# Altium PCB PCB.PcbDoc
Units mm, origin at the board's own origin, x right, y up, seen from the top; angles counter-clockwise.
Board outline 140 x 140 mm, 2 copper layers (Top Layer, Bottom Layer); 231 components, 171 nets, 631 pads, 0 vias.
Unrouted connection lines stored in the file: 429.
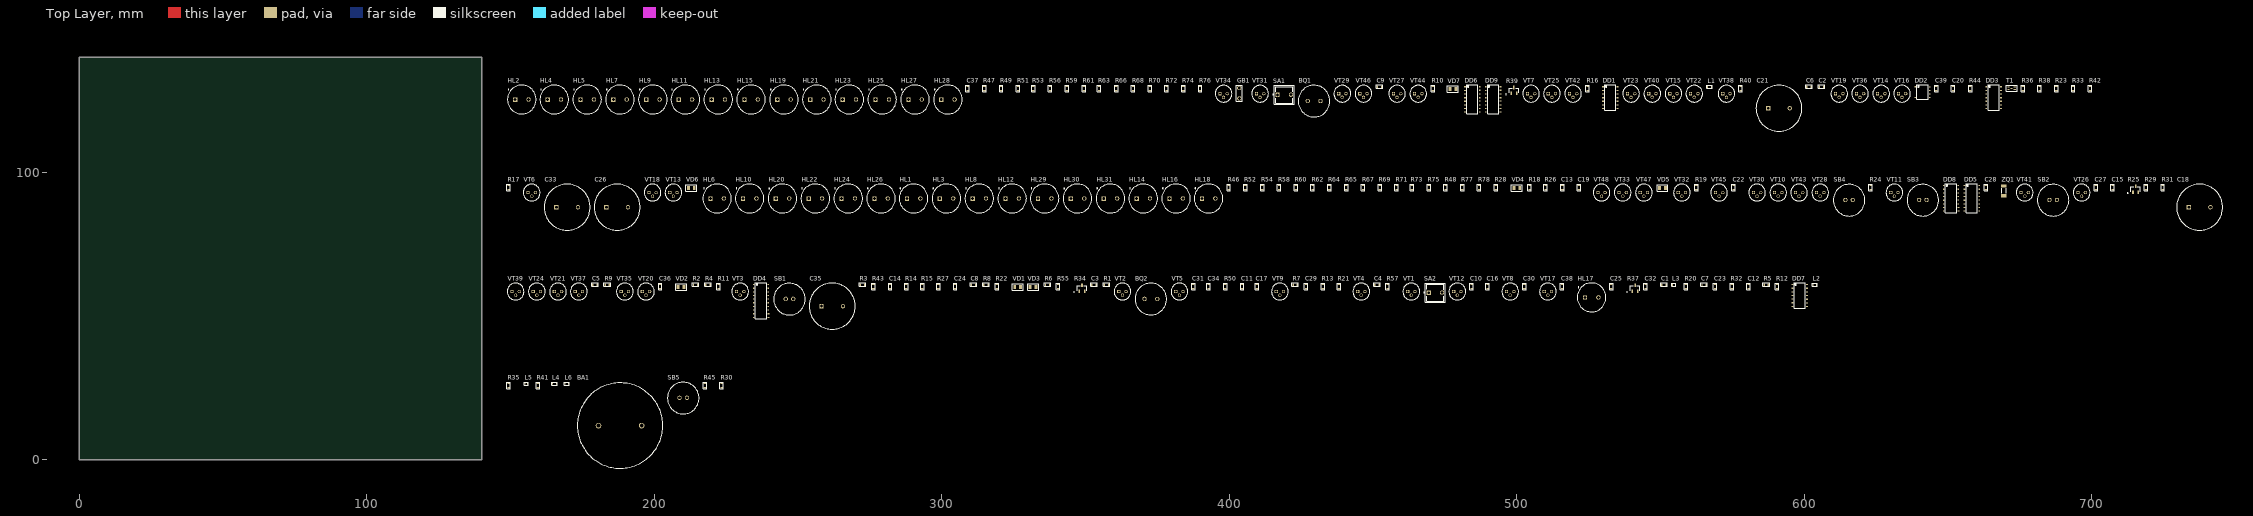
[diagram p0: Top Layer view]
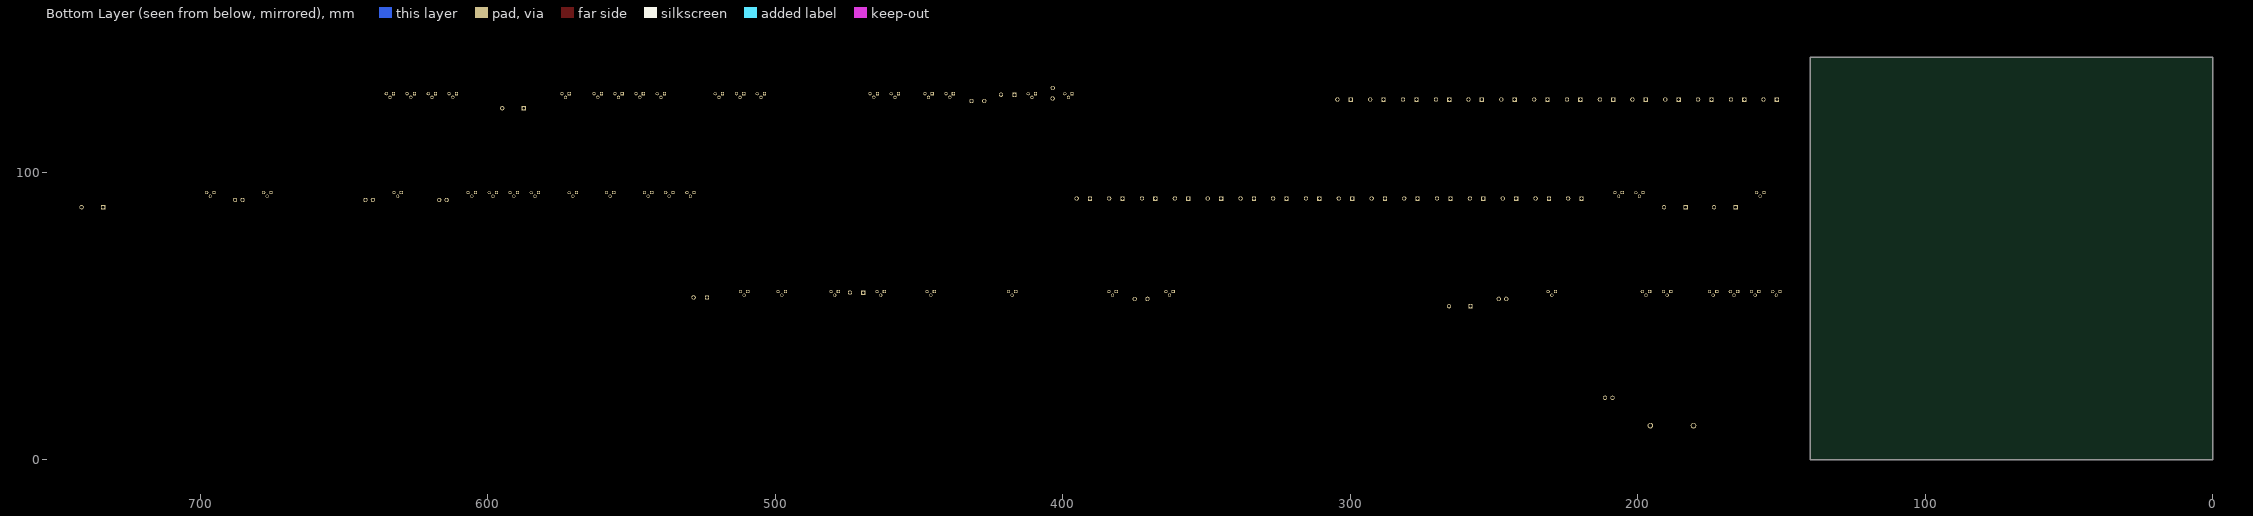
[diagram p1: Bottom Layer view, seen from below]

## Layer stack, top to bottom
Top Solder: solder mask 0.0102, Solder Resist, Dk 3.5
Top Layer: signal copper 0.0356
Dielectric 1: dielectric 0.32, FR-4, Dk 4.8
Bottom Layer: signal copper 0.0356
Bottom Solder: solder mask 0.0102, Solder Resist, Dk 3.5

## Board outline
0,0 140,0 140,140 0,140

## Design rules (kind name [scope] priority, off if disabled: settings)
Clearance [All] p1: gap=0.254 ignorepadtopadclearanceinfootprint=FALSE except(0: Arc-Hole Track-Hole SMDPad-Hole THPad-Hole Via-Hole Fill-Hole Poly-Hole Region-Hole Text-Hole)
PolygonConnect [All] p1: connectstyle=Relief reliefconductorwidth=0.254 reliefentries=4 polygonreliefangle="90 Angle" airgapwidth=0.254
RoomDefinition A1H1_last2.0 [InComponentClass('A1H1_last2.0')] p1: confinementstyle=ConfineIn formatcopy=TRUE lockcomponents=FALSE outline 148.543,-3.403 745.697,-3.403 745.697,133.122 148.543,133.122
RoutingVias [All] p1: holewidth=0.711 width=1.27 viastyle="Through Hole" minholewidth=0.711 minwidth=1.27 maxholewidth=0.711 maxwidth=1.27
SolderMaskExpansion [All] p1: expansion=0.102 istentingtop=FALSE
Width [All] p1: maxlimit=0.254 minlimit=0.254 preferedwidth=0.254
30 further rules are at their usual default settings.

## Components (designator, comment, footprint, x,y, rotation, side; value= is the part's Value field where it differs from the comment)
BA1 "DINAMYC" DINAMIK 188.04,11.964 r0 top
BQ1 "datchik" ZP-1 429.34,124.867 r0 top
BQ2 "datchik" ZP-1 372.571,56.033 r0 top
C1 "Cap" "SMD 0603" 551.133,60.986 r0 top
C2 "Cap" "SMD 0603" 605.87,129.82 r0 top
C3 "Cap" "SMD 0603" 352.886,60.986 r0 top
C4 "Cap" "SMD 0603" 451.311,60.986 r0 top
C5 "Cap" "SMD 0603" 179.277,60.986 r0 top
C6 "Cap" "SMD 0603" 601.552,129.82 r0 top
C7 "Cap" "SMD 0603" 565.103,60.986 r0 top
C8 "Cap" "SMD 0603" 310.976,60.986 r0 top
C9 "Cap" "SMD 0603" 452.2,129.82 r0 top
C10 "Cap" "SMD 0603" 484.204,60.351 r90 top
C11 "Cap" "SMD 0603" 404.448,60.351 r90 top
C12 "Cap" "SMD 0603" 580.597,60.351 r90 top
C13 "Cap" "SMD 0603" 515.827,94.768 r90 top
C14 "Cap" "SMD 0603" 282.02,60.351 r90 top
C15 "Cap" "SMD 0603" 707.216,94.768 r90 top
C16 "Cap" "SMD 0603" 489.792,60.351 r90 top
C17 "Cap" "SMD 0603" 409.528,60.351 r90 top
C18 "CapPlus" cap 737.442,87.91 r0 top
C19 "Cap" "SMD 0603" 521.542,94.768 r90 top
C20 "Cap" "SMD 0603" 651.717,129.185 r90 top
C21 "CapPlus" cap 591.138,122.327 r0 top
C22 "Cap" "SMD 0603" 575.39,94.768 r90 top
C23 "Cap" "SMD 0603" 568.913,60.351 r90 top
C24 "Cap" "SMD 0603" 304.626,60.351 r90 top
C25 "Cap" "SMD 0603" 532.845,60.351 r90 top
C26 "CapPlus" cap 187.024,87.91 r0 top
C27 "Cap" "SMD 0603" 701.374,94.768 r90 top
C28 "Cap" "SMD 0603" 663.147,94.768 r90 top
C29 "Cap" "SMD 0603" 426.673,60.351 r90 top
C30 "Cap" "SMD 0603" 502.619,60.351 r90 top
C31 "Cap" "SMD 0603" 387.43,60.351 r90 top
C32 "Cap" "SMD 0603" 544.783,60.351 r90 top
C33 "CapPlus" cap 169.625,87.91 r0 top
C34 "Cap" "SMD 0603" 392.764,60.351 r90 top
C35 "CapPlus" cap 261.827,53.493 r0 top
C36 "Cap" "SMD 0603" 202.01,60.351 r90 top
C37 "Cap" "SMD 0603" 308.944,129.185 r90 top
C38 "Cap" "SMD 0603" 515.7,60.351 r90 top
C39 "Cap" "SMD 0603" 645.875,129.185 r90 top
DD1 "dd" DIP14 529.924,129.82 r0 top
DD2 "K561TM2" DD2 638.509,129.82 r0 top
DD3 "К561ЛН2" DIP14 663.274,129.82 r0 top
DD4 "AT89C2051" DD4 234.522,60.986 r0 top
DD5 "К561ИР2" DIP16 655.654,95.403 r0 top
DD6 "К561ИР2" DIP16 481.918,129.82 r0 top
DD7 "dd" DIP14 595.837,60.986 r0 top
DD8 "К561ИР2" DIP16 648.415,95.403 r0 top
DD9 "К561ИР2" DIP16 489.157,129.82 r0 top
GB1 "batareyka" BATAREIKA 404.448,110.008 r90 top
HL1 "sveto_diod" HL 290.148,90.958 r0 top
HL2 "sveto_diod" HL 153.877,125.375 r0 top
HL3 "sveto_diod" HL 301.578,90.958 r0 top
HL4 "sveto_diod" HL 165.18,125.375 r0 top
HL5 "sveto_diod" HL 176.61,125.375 r0 top
HL6 "sveto_diod" HL 221.822,90.958 r0 top
HL7 "sveto_diod" HL 188.04,125.375 r0 top
HL8 "sveto_diod" HL 313.008,90.958 r0 top
HL9 "sveto_diod" HL 199.47,125.375 r0 top
HL10 "sveto_diod" HL 233.125,90.958 r0 top
HL11 "sveto_diod" HL 210.773,125.375 r0 top
HL12 "sveto_diod" HL 324.438,90.958 r0 top
HL13 "sveto_diod" HL 222.203,125.375 r0 top
HL14 "sveto_diod" HL 370.031,90.958 r0 top
HL15 "sveto_diod" HL 233.633,125.375 r0 top
HL16 "sveto_diod" HL 381.461,90.958 r0 top
HL17 "sveto_diod" HL 525.987,56.541 r0 top
HL18 "sveto_diod" HL 392.764,90.958 r0 top
HL19 "sveto_diod" HL 245.063,125.375 r0 top
HL20 "sveto_diod" HL 244.555,90.958 r0 top
HL21 "sveto_diod" HL 256.493,125.375 r0 top
HL22 "sveto_diod" HL 255.985,90.958 r0 top
HL23 "sveto_diod" HL 267.796,125.375 r0 top
HL24 "sveto_diod" HL 267.415,90.958 r0 top
HL25 "sveto_diod" HL 279.226,125.375 r0 top
HL26 "sveto_diod" HL 278.845,90.958 r0 top
HL27 "sveto_diod" HL 290.656,125.375 r0 top
HL28 "sveto_diod" HL 302.086,125.375 r0 top
HL29 "sveto_diod" HL 335.741,90.958 r0 top
HL30 "sveto_diod" HL 347.171,90.958 r0 top
HL31 "sveto_diod" HL 358.601,90.958 r0 top
L1 "induktor_4" inductor 567.008,129.82 r0 top
L2 "induktor_4" inductor 603.584,60.986 r0 top
L3 "induktor_2" INDUCTOR_LOW 554.562,60.986 r0 top
L4 "induktor_4" inductor 165.18,26.569 r0 top
L5 "induktor_2" INDUCTOR_LOW 155.401,26.569 r0 top
L6 "induktor_4" inductor 169.498,26.569 r0 top
R1 "res" "SMD 0603" 357.204,60.986 r0 top
R2 "res" "SMD 0603" 214.329,60.986 r0 top
R3 "res" "SMD 0603" 272.368,60.986 r0 top
R4 "res" "SMD 0603" 218.647,60.986 r0 top
R5 "res" "SMD 0603" 586.693,60.986 r0 top
R6 "res" "SMD 0603" 336.757,60.986 r0 top
R7 "res" "SMD 0603" 422.863,60.986 r0 top
R8 "res" "SMD 0603" 315.294,60.986 r0 top
R9 "res" "SMD 0603" 183.595,60.986 r0 top
R10 "res" "SMD 0603" 470.742,129.185 r90 top
R11 "res" "SMD 0603" 222.33,60.351 r90 top
R12 "res" "SMD 0603" 590.503,60.351 r90 top
R13 "res" "SMD 0603" 432.515,60.351 r90 top
R14 "res" "SMD 0603" 287.608,60.351 r90 top
R15 "res" "SMD 0603" 293.196,60.351 r90 top
R16 "res" "SMD 0603" 524.59,129.185 r90 top
R17 "res" "SMD 0603" 149.305,94.768 r90 top
R18 "res" "SMD 0603" 504.397,94.768 r90 top
R19 "res" "SMD 0603" 562.436,94.768 r90 top
R20 "res" "SMD 0603" 558.753,60.351 r90 top
R21 "res" "SMD 0603" 438.103,60.351 r90 top
R22 "res" "SMD 0603" 319.104,60.351 r90 top
R23 "res" "SMD 0603" 687.658,129.185 r90 top
R24 "res" "SMD 0603" 623.015,94.768 r90 top
R25 "res_per" 21-0051H 715.217,94.133 r0 top
R26 "res" "SMD 0603" 509.985,94.768 r90 top
R27 "res" "SMD 0603" 298.784,60.351 r90 top
R28 "res" "SMD 0603" 492.713,94.768 r90 top
R29 "res" "SMD 0603" 718.773,94.768 r90 top
R30 "res" "SMD 0603" 223.346,25.934 r90 top
R31 "res" "SMD 0603" 724.615,94.768 r90 top
R32 "res" "SMD 0603" 574.755,60.351 r90 top
R33 "res" "SMD 0603" 693.5,129.185 r90 top
R34 "res_per" 21-0051H 348.695,59.716 r0 top
R35 "res" "SMD 0603" 149.305,25.934 r90 top
R36 "res" "SMD 0603" 675.974,129.185 r90 top
R37 "res_per" 21-0051H 541.1,59.716 r0 top
R38 "res" "SMD 0603" 681.816,129.185 r90 top
R39 "res_per" 21-0051H 498.936,128.55 r0 top
R40 "res" "SMD 0603" 577.803,129.185 r90 top
R41 "res" "SMD 0603" 159.465,25.934 r90 top
R42 "res" "SMD 0603" 699.342,129.185 r90 top
R43 "res" "SMD 0603" 276.178,60.351 r90 top
R44 "res" "SMD 0603" 657.686,129.185 r90 top
R45 "res" "SMD 0603" 217.504,25.934 r90 top
R46 "res" "SMD 0603" 399.749,94.768 r90 top
R47 "res" "SMD 0603" 314.786,129.185 r90 top
R48 "res" "SMD 0603" 475.187,94.768 r90 top
R49 "res" "SMD 0603" 320.628,129.185 r90 top
R50 "res" "SMD 0603" 398.606,60.351 r90 top
R51 "res" "SMD 0603" 326.47,129.185 r90 top
R52 "res" "SMD 0603" 405.591,94.768 r90 top
R53 "res" "SMD 0603" 331.804,129.185 r90 top
R54 "res" "SMD 0603" 411.433,94.768 r90 top
R55 "res" "SMD 0603" 340.44,60.351 r90 top
R56 "res" "SMD 0603" 337.646,129.185 r90 top
R57 "res" "SMD 0603" 454.994,60.351 r90 top
R58 "res" "SMD 0603" 417.275,94.768 r90 top
R59 "res" "SMD 0603" 343.488,129.185 r90 top
R60 "res" "SMD 0603" 423.117,94.768 r90 top
R61 "res" "SMD 0603" 349.33,129.185 r90 top
R62 "res" "SMD 0603" 428.959,94.768 r90 top
R63 "res" "SMD 0603" 354.664,129.185 r90 top
R64 "res" "SMD 0603" 434.801,94.768 r90 top
R65 "res" "SMD 0603" 440.643,94.768 r90 top
R66 "res" "SMD 0603" 360.633,129.185 r90 top
R67 "res" "SMD 0603" 446.485,94.768 r90 top
R68 "res" "SMD 0603" 366.475,129.185 r90 top
R69 "res" "SMD 0603" 452.327,94.768 r90 top
R70 "res" "SMD 0603" 372.317,129.185 r90 top
R71 "res" "SMD 0603" 458.169,94.768 r90 top
R72 "res" "SMD 0603" 378.159,129.185 r90 top
R73 "res" "SMD 0603" 463.503,94.768 r90 top
R74 "res" "SMD 0603" 384.001,129.185 r90 top
R75 "res" "SMD 0603" 469.345,94.768 r90 top
R76 "res" "SMD 0603" 389.843,129.185 r90 top
R77 "res" "SMD 0603" 481.029,94.768 r90 top
R78 "res" "SMD 0603" 486.871,94.768 r90 top
SA1 "key2" switch 419.053,127.026 r0 top
SA2 "key2" switch 471.631,58.192 r0 top
SB1 "key3" BUTTON 246.968,56.033 r0 top
SB2 "key3" BUTTON 686.515,90.45 r0 top
SB3 "key3" BUTTON 641.176,90.45 r0 top
SB4 "key3" BUTTON 615.522,90.45 r0 top
SB5 "key3" BUTTON 210.011,21.616 r0 top
T1 "transformator" TRANSFORMATOR4 672.037,129.312 r0 top
VD1 "diod" res 326.343,60.224 r0 top
VD2 "diod" res 209.249,60.224 r0 top
VD3 "diod" res 331.677,60.224 r0 top
VD4 "diod" res 499.952,94.641 r0 top
VD5 "diod" res 550.625,94.641 r0 top
VD6 "diod" res 212.805,94.641 r0 top
VD7 "diod" res 477.727,129.058 r0 top
VT1 "TransistorNpN" Transistor 463.249,58.573 r0 top
VT2 "TransistorNpN" Transistor 362.792,58.573 r0 top
VT3 "TransistorNpN" Transistor 229.823,58.573 r0 top
VT4 "TransistorNpN" Transistor 445.85,58.573 r0 top
VT5 "TransistorNpN" Transistor 382.604,58.573 r0 top
VT6 "TransistorNpN" Transistor 157.306,92.99 r0 top
VT7 "TransistorNN" Transistor 504.905,127.407 r0 top
VT8 "TransistorNpN" Transistor 497.666,58.573 r0 top
VT9 "TransistorNpN" Transistor 417.529,58.573 r0 top
VT10 "TransistorNpN" Transistor 590.884,92.99 r0 top
VT11 "TransistorNpN" Transistor 631.27,92.99 r0 top
VT12 "TransistorNN" Transistor 479.251,58.573 r0 top
VT13 "TransistorPnP" Transistor 206.582,92.99 r0 top
VT14 "TransistorUNO" Transistor 626.698,127.407 r0 top
VT15 "TransistorNN" Transistor 554.435,127.407 r0 top
VT16 "TransistorUNO" Transistor 633.937,127.407 r0 top
VT17 "TransistorNpN" Transistor 510.747,58.573 r0 top
VT18 "TransistorPnP" Transistor 199.343,92.99 r0 top
VT19 "TransistorNpN" Transistor 612.093,127.407 r0 top
VT20 "TransistorNpN" Transistor 197.057,58.573 r0 top
VT21 "TransistorNpN" Transistor 166.45,58.573 r0 top
VT22 "TransistorNpN" Transistor 561.674,127.407 r0 top
VT23 "TransistorNpN" Transistor 539.703,127.407 r0 top
VT24 "TransistorNpN" Transistor 159.084,58.573 r0 top
VT25 "TransistorNpN" Transistor 512.144,127.407 r0 top
VT26 "TransistorNpN" Transistor 696.421,92.99 r0 top
VT27 "TransistorNpN" Transistor 458.296,127.407 r0 top
VT28 "TransistorNpN" Transistor 605.489,92.99 r0 top
VT29 "TransistorNpN" Transistor 439.246,127.407 r0 top
VT30 "TransistorNpN" Transistor 583.518,92.99 r0 top
VT31 "TransistorNpN" Transistor 410.671,127.407 r0 top
VT32 "TransistorNpN" Transistor 557.356,92.99 r0 top
VT33 "TransistorNpN" Transistor 536.782,92.99 r0 top
VT34 "TransistorNpN" Transistor 397.971,127.407 r0 top
VT35 "TransistorNpN" Transistor 189.691,58.573 r0 top
VT36 "TransistorNpN" Transistor 619.332,127.407 r0 top
VT37 "TransistorNpN" Transistor 173.689,58.573 r0 top
VT38 "TransistorNpN" Transistor 572.85,127.407 r0 top
VT39 "TransistorNpN" Transistor 151.718,58.573 r0 top
VT40 "TransistorNpN" Transistor 547.069,127.407 r0 top
VT41 "TransistorNpN" Transistor 676.609,92.99 r0 top
VT42 "TransistorNpN" Transistor 519.51,127.407 r0 top
VT43 "TransistorNpN" Transistor 598.123,92.99 r0 top
VT44 "TransistorNpN" Transistor 465.662,127.407 r0 top
VT45 "TransistorNpN" Transistor 570.31,92.99 r0 top
VT46 "TransistorNpN" Transistor 446.612,127.407 r0 top
VT47 "TransistorNpN" Transistor 544.148,92.99 r0 top
VT48 "TransistorNpN" Transistor 529.416,92.99 r0 top
ZQ1 "Resonator" ZQ 669.37,93.625 r90 top

## Footprints (in the part's own frame and the unit in brackets; to place one, negate y for a bottom-side part, rotate by r counter-clockwise, add the part's x,y. Pads: shape width x height; smd on the part's side, far side on the other; paste and mask are expansions set on the pad)
21-0051H [mil]
  rect 22x51 smd: 1(-37.4,-40.5) 2(37.4,-40.5) 3(0,40.5)
  silkscreen extent -115,-57 65,32
BATAREIKA [mm]
  round 1.5 hole 1: N(15.725,1) P(19.375,1.05)
  silkscreen extent 14.77,-0.03 20.35,2.02
BUTTON [mm]
  round 1.5 hole 1: 1(-1.3,0) 2(1.3,0)
  silkscreen extent -5.5,-5.6 5.5,5.4
cap [mm]
  rect 1.5x1.5 hole 1: 1(-3.75,0)
  round 1.5 hole 1: 2(3.75,0)
  silkscreen extent -8,-8 8,8
DD2 [mm]
  rect 0.6x0.4 smd: 1(0,0) 2(0,-3.7) 3(5.1,-2.5) 4(5.1,-3.7) 5(5.08,-1.31) 6(5.08,-0.04)
  silkscreen extent 0.6,-4.3 4.5,0.6
DD4 [mm]
  rect 0.6x0.4 smd: 1(0,0) 1(5.1,0.025) 2(0,-1.27) 2(5.1,-1.245) 3(0,-2.54) 3(5.1,-2.515) 4(0,-3.81) 4(5.1,-3.785) 5(0.005,-5.05) 5(5.105,-5.025) 6(0.005,-6.32) 6(5.105,-6.295) 7(0.005,-7.59) 7(5.105,-7.565) 8(0.005,-8.86) 8(5.105,-8.835) 9(0.03,-10.14) 9(5.13,-10.115) 10(0.03,-11.41) 10(5.13,-11.385)
  silkscreen extent 0.6,-11.95 4.5,0.6
DINAMIK [mm]
  round 1.95 hole 1.3: N(7.5,0) P(-7.5,0)
  silkscreen extent -14.85,-14.85 14.85,14.85
DIP14 [mm]
  rect 0.6x0.4 smd: 1(0,0) 2(0,-1.27) 3(0,-2.54) 4(0,-3.81) 5(0.005,-5.045) 6(0.005,-6.315) 7(0.005,-7.585) 8(5.08,-7.61) 9(5.08,-6.34) 10(5.08,-5.07) 11(5.08,-3.81) 12(5.08,-2.54) 13(5.08,-1.27) 14(5.08,0)
  silkscreen extent 0.6,-8.23 4.5,0.6
DIP16 [mm]
  rect 0.6x0.4 smd: 1(0,0) 2(0,-1.27) 3(0,-2.54) 4(0,-3.81) 5(0.005,-5.045) 6(0.005,-6.315) 7(0,-7.55) 8(0,-8.75) 9(5.15,-8.75) 10(5.13,-7.545) 11(5.125,-6.325) 12(5.125,-5.025) 13(5.125,-3.825) 14(5.125,-2.525) 15(5.125,-1.25) 16(5.125,0)
  silkscreen extent 0.6,-9.35 4.5,0.6
HL [mm]
  rect 1.5x1.5 hole 1: 1(-2.325,-0.05)
  round 1.5 hole 1: 2(2.325,0)
  silkscreen extent -5.02,-5 4.98,5
inductor [mm]
  rect 0.3x0.8 smd: 1(-0.675,0) 2(0.675,0)
  silkscreen extent -0.92,-0.5 0.92,0.5
INDUCTOR_LOW [mm]
  rect 0.3x0.8 smd: 1(-0.487,0) 2(0.487,0)
  silkscreen extent -0.74,-0.5 0.74,0.5
res [mm]
  rect 1x1.42 smd: 1(-1.016,0) 2(1.016,0)
  silkscreen extent -1.91,-1.14 1.91,1.14
"SMD 0603" [mm]
  rect 0.5x0.9 smd: 1(-0.75,0) 2(0.75,0)
  silkscreen extent -1.15,-0.6 1.15,0.6
switch [mm]
  rect 1.5x1.5 hole 1: 1(-2.325,-0.025)
  round 1.5 hole 1: 2(2.325,0.025)
  silkscreen extent -4.03,-3.37 3.4,3.27
TRANSFORMATOR4 [mm]
  rect 0.75x0.4 smd: 1(-1.087,0.4) 2(-1.087,-0.4) 3(1.088,-0.4) 4(1.088,0.4) 5(0,-0.05)
  silkscreen extent -1.89,-1 1.91,1
Transistor [mm]
  rect 1.13x1.13 hole 0.73: 1(-1.27,0)
  round 1.13 hole 0.73: 2(0,-1.27) 3(1.27,0)
  silkscreen extent -2.92,-2.92 2.92,2.92
ZP-1 [mm]
  round 1.5 hole 1: 1(-2.1,0) 2(2.325,-0.025)
  silkscreen extent -5.42,-5.55 5.58,5.45
ZQ [mm]
  rect 1.1x1.9 smd: 1(-1.7,0) 2(1.7,0)
  silkscreen extent -0.83,-0.75 0.83,0.75

## Nets (pads, with @x,y where several pads share a name; then routed paths per layer and width w, separated by ;. In a path a pad name is that pad's centre, name@x,y a point inside that pad or via, vN(x,y) a via of type N, cw(c..) or ccw(c..) an arc to the next point about the centre after c; other vN are vias at no path point)
+: BQ1.1 BQ1.2 C1.2 C2.1 C4.1 C5.2 C6.2 C9.1 C9.2 C10.1 C13.2 C14.2 C15.2 C16.1 C18.2 C19.2 C20.1 C21.2 C23.2 C24.2 C25.1 C26.2 C27.1 C28.1 C33.1 C33.2 C35.2 C36.1 C36.2 C37.1 C37.2 C39.2 DD1.1 DD1.2 DD2.4 DD2.6 DD4.10 GB1.N HL1.2 HL2.2 HL3.2 HL4.2 HL5.2 HL6.2 HL7.2 HL8.2 HL9.2 HL10.2 HL11.2 HL12.2 HL13.2 HL14.2 HL15.2 HL16.2 HL17.1 HL18.2 HL19.2 HL20.2 HL21.2 HL22.2 HL23.2 HL24.2 HL25.2 HL26.2 HL27.2 HL28.2 HL29.2 HL30.2 HL31.2 L3.2 L5.2 R1.1 R6.2 R9.1 R10.1 R10.2 R11.2 R14.1 R15.2 R18.1 R22.2 R26.1 R27.2 R28.1 R36.2 R38.2 R39.2 R39.3 R40.1 R42.2 R45.2 R50.2 SA2.2 SB2.2 SB3.2 SB4.2 SB5.2 T1.3 T1.4 VD1.1 VD3.2 VD4.2 VT3.3 VT6.3 VT7.1 VT13.3 VT14.3 VT15.1 VT16.2 VT16.3 VT18.1
-4,5В: R34.2 R34.3 R43.2 VT12.1 VT17.3
NetBA1_N: BA1.N C30.2 C32.2 C34.1 VT17.1
NetBA1_P: BA1.P R32.2 R35.2 R41.1 SB5.1
NetBQ2_1: BQ2.1 DD7.10
NetBQ2_2: BQ2.2 DD7.12 R57.1
NetC1_1: C1.1 C7.1 C12.1 C23.1 L2.1 L4.1 L6.1 R3.2 R5.1 R12.2 R20.1 R30.1
NetC2_2: C2.2 DD1.5 L1.1
NetC3_1: C3.1 R1.2 VD1.2 VD3.1
NetC3_2: C3.2 R6.1 R7.2 VT2.2
NetC4_2: C4.2 R5.2 R7.1 VT1.2
NetC5_1: C5.1 R2.2 R3.1 R4.1
NetC6_1: C6.1 DD1.4 DD1.8 DD1.9 L1.2
NetC7_2: C7.2 L2.2 VT1.1
NetC8_1: C8.1 R8.1 VT2.3
NetC8_2: C8.2 R8.2 R11.1 VT3.1
NetC10_2: C10.2 R12.1 R13.2 VT4.2
NetC11_1: C11.1 L3.1
NetC11_2: C11.2 R13.1 R14.2 VT5.2
NetC12_2: C12.2 L4.2 VT4.1
NetC13_1: C13.1 R18.2 R19.1 VD5.1
NetC14_1: C14.1 R15.1 VT5.3
NetC15_1: C15.1 C18.1 R25.2 R25.3 R29.2 R30.2 R31.2 VT18.3
NetC16_2: C16.2 R20.2 R21.1 VT8.2
NetC17_1: C17.1 L5.1
NetC17_2: C17.2 VT9.2
NetC19_1: C19.1 C22.1 R19.2
NetC20_2: C20.2 C21.1 R23.1 T1.5
NetC22_2: C22.2 R24.1 R26.2 VT10.2
NetC24_1: C24.1 R27.1 VT9.3
NetC25_2: C25.2 VD4.1 VD5.2
NetC26_1: C26.1 R23.2 R33.2 VT13.1
NetC27_2: C27.2 DD4.4 ZQ1.2
NetC28_2: C28.2 DD4.5 ZQ1.1
NetC29_1: C29.1 R32.1 VT12.3
NetC29_2: C29.2 C31.1 R41.2 VT17.2
NetC30_1: C30.1 R35.1 R37.1 VT12.2
NetC31_2: C31.2 C34.2 R34.1
NetC32_1: C32.1 R37.2 R37.3
NetC35_1: C35.1 DD4.1 R43.1 SB1.2
NetC38_1: C38.1 DD7.3 DD7.13
NetC38_2: C38.2 DD7.5 DD7.6 R50.1
NetC39_1: C39.1 VT19.1 VT20.1 VT21.1 VT22.1 VT23.1 VT24.1 VT25.1 VT26.1 VT27.1 VT28.1 VT29.1 VT30.1 VT31.1 VT32.1 VT33.1 VT34.1 VT35.1 VT36.1 VT37.1 VT38.1 VT39.1 VT40.1 VT41.1 VT42.1 VT43.1 VT44.1 VT45.1 VT46.1 VT47.1 VT48.1
NetDD1_3: DD1.3 DD1.6
NetDD1_10: DD1.10 DD2.3
NetDD2_1: DD2.1 DD3.1 DD3.11 DD3.13
NetDD2_2: DD2.2 DD2.5 DD3.3 DD3.5 DD3.9
NetDD3_2: DD3.2 DD3.10 DD3.12 R17.1 VD6.2
NetDD3_4: DD3.4 DD3.6 DD3.8 R16.1 VD7.2
NetDD4_6: DD4.6 R31.1 VT11.1
NetDD4_13: VD2.2
NetDD4_14: DD5.6 DD5.14 DD6.6 DD6.14 DD8.6 DD8.14 DD9.6 DD9.14 R44.1
NetDD4_15: SB4.1
NetDD4_16: SB3.1
NetDD4_17: SB2.1
NetDD4_18: DD5.1 DD5.9 DD6.1 DD6.9 DD8.1 DD8.9 DD9.1 DD9.9
NetDD4_19: DD5.7
NetDD5_2: DD5.2 DD8.7 VT33.2
NetDD5_3: DD5.3 VT24.2
NetDD5_4: DD5.4 VT21.2
NetDD5_5: DD5.5 VT20.2
NetDD5_10: DD5.10 DD5.15 VT26.2
NetDD5_11: DD5.11 VT32.2
NetDD5_12: DD5.12 VT30.2
NetDD5_13: DD5.13 VT28.2
NetDD6_2: DD6.2 DD9.7 VT34.2
NetDD6_3: DD6.3 VT23.2
NetDD6_4: DD6.4 VT22.2
NetDD6_5: DD6.5 VT19.2
NetDD6_7: DD6.7 DD8.2 VT48.2
NetDD6_10: DD6.10 DD6.15 VT25.2
NetDD6_11: DD6.11 VT31.2
NetDD6_12: DD6.12 VT29.2
NetDD6_13: DD6.13 VT27.2
NetDD7_1: DD7.1 R45.1 SA2.1
NetDD7_2: DD7.2 DD7.4 R55.1
NetDD7_8: DD7.8 DD7.9 DD7.11 R57.2
NetDD8_3: DD8.3 VT39.2
NetDD8_4: DD8.4 VT37.2
NetDD8_5: DD8.5 VT35.2
NetDD8_10: DD8.10 DD8.15 VT41.2
NetDD8_11: DD8.11 VT47.2
NetDD8_12: DD8.12 VT45.2
NetDD8_13: DD8.13 VT43.2
NetDD9_3: DD9.3 VT40.2
NetDD9_4: DD9.4 VT38.2
NetDD9_5: DD9.5 VT36.2
NetDD9_10: DD9.10 DD9.15 VT42.2
NetDD9_12: DD9.12 VT46.2
NetDD9_13: DD9.13 VT44.2
NetGB1_P: GB1.P SA1.1
NetHL1_1: HL1.1 R46.1
NetHL2_1: HL2.1 R47.1
NetHL3_1: HL3.1 R48.1
NetHL4_1: HL4.1 R49.1
NetHL5_1: HL5.1 R51.1
NetHL6_1: HL6.1 R52.1
NetHL7_1: HL7.1 R53.1
NetHL8_1: HL8.1 R54.1
NetHL9_1: HL9.1 R56.1
NetHL10_1: HL10.1 R58.1
NetHL11_1: HL11.1 R59.1
NetHL12_1: HL12.1 R60.1
NetHL13_1: HL13.1 R61.1
NetHL14_1: HL14.1 R62.1
NetHL15_1: HL15.1 R63.1
NetHL16_1: HL16.1 R64.1
NetHL17_2: HL17.2 R55.2
NetHL18_1: HL18.1 R65.1
NetHL19_1: HL19.1 R66.1
NetHL20_1: HL20.1 R67.1
NetHL21_1: HL21.1 R68.1
NetHL22_1: HL22.1 R69.1
NetHL23_1: HL23.1 R70.1
NetHL24_1: HL24.1 R71.1
NetHL25_1: HL25.1 R72.1
NetHL26_1: HL26.1 R73.1
NetHL27_1: HL27.1 R74.1
NetHL28_1: HL28.1 R76.1
NetHL29_1: HL29.1 R75.1
NetHL30_1: HL30.1 R77.1
NetHL31_1: HL31.1 R78.1
NetL6_2: L6.2 VT8.1
NetR2_1: R2.1 VD2.1
NetR4_2: R4.2 R9.2 VT3.2
NetR16_2: R16.2 VD7.1 VT7.2
NetR17_2: R17.2 VD6.1 VT6.2
NetR21_2: R21.2 R22.1
NetR24_2: R24.2 R25.1
NetR28_2: R28.2 VT10.3 VT11.3
NetR29_1: R29.1 VT10.1 VT11.2
NetR33_1: R33.1 VT13.2 VT14.1
NetR36_1: R36.1 VT14.2 VT15.3
NetR38_1: R38.1 R39.1 VT15.2
NetR40_2: R40.2 VT16.1
NetR42_1: R42.1 R44.2 VT18.2
NetR46_2: R46.2 VT20.3
NetR47_2: R47.2 VT19.3
NetR48_2: R48.2 VT21.3
NetR49_2: R49.2 VT22.3
NetR51_2: R51.2 VT23.3
NetR52_2: R52.2 VT24.3
NetR53_2: R53.2 VT25.3
NetR54_2: R54.2 VT26.3
NetR56_2: R56.2 VT27.3
NetR58_2: R58.2 VT28.3
NetR59_2: R59.2 VT29.3
NetR60_2: R60.2 VT30.3
NetR61_2: R61.2 VT31.3
NetR62_2: R62.2 VT32.3
NetR63_2: R63.2 VT34.3
NetR64_2: R64.2 VT33.3
NetR65_2: R65.2 VT35.3
NetR66_2: R66.2 VT36.3
NetR67_2: R67.2 VT37.3
NetR68_2: R68.2 VT38.3
NetR69_2: R69.2 VT39.3
NetR70_2: R70.2 VT40.3
NetR71_2: R71.2 VT41.3
NetR72_2: R72.2 VT42.3
NetR73_2: R73.2 VT43.3
NetR74_2: R74.2 VT44.3
NetR75_2: R75.2 VT45.3
NetR76_2: R76.2 VT46.3
NetR77_2: R77.2 VT47.3
NetR78_2: R78.2 VT48.3
NetT1_1: T1.1 VT6.1
NetT1_2: T1.2 VT7.3
NetVT1_3: VT1.3 VT2.1
NetVT4_3: VT4.3 VT5.1
NetVT8_3: VT8.3 VT9.1
pads on no net: DD1.7 DD1.11 DD1.12 DD1.13 DD1.14 DD3.7 DD3.14 DD4.2 DD4.3 DD4.7 DD4.8 DD4.9 DD5.8 DD5.16 DD6.8 DD6.16 DD7.7 DD7.14 DD8.8 DD8.16 DD9.2 DD9.8 DD9.11 DD9.16 SA1.2 SB1.1

## Silkscreen, mask and mechanical layers (free items; w line width, h text height)
Mechanical 1:
  the board outline again, w0.05